# Altium PCB PCB_Микроконтроллер_2_2024-08-21.pcbdoc
Units mil, origin at the board's own origin, x right, y up, seen from the top; angles counter-clockwise.
Board outline 3360.7 x 2770 mil, 2 copper layers (Top Layer, Bottom Layer); 19 components, 17 nets, 81 pads, 0 vias.
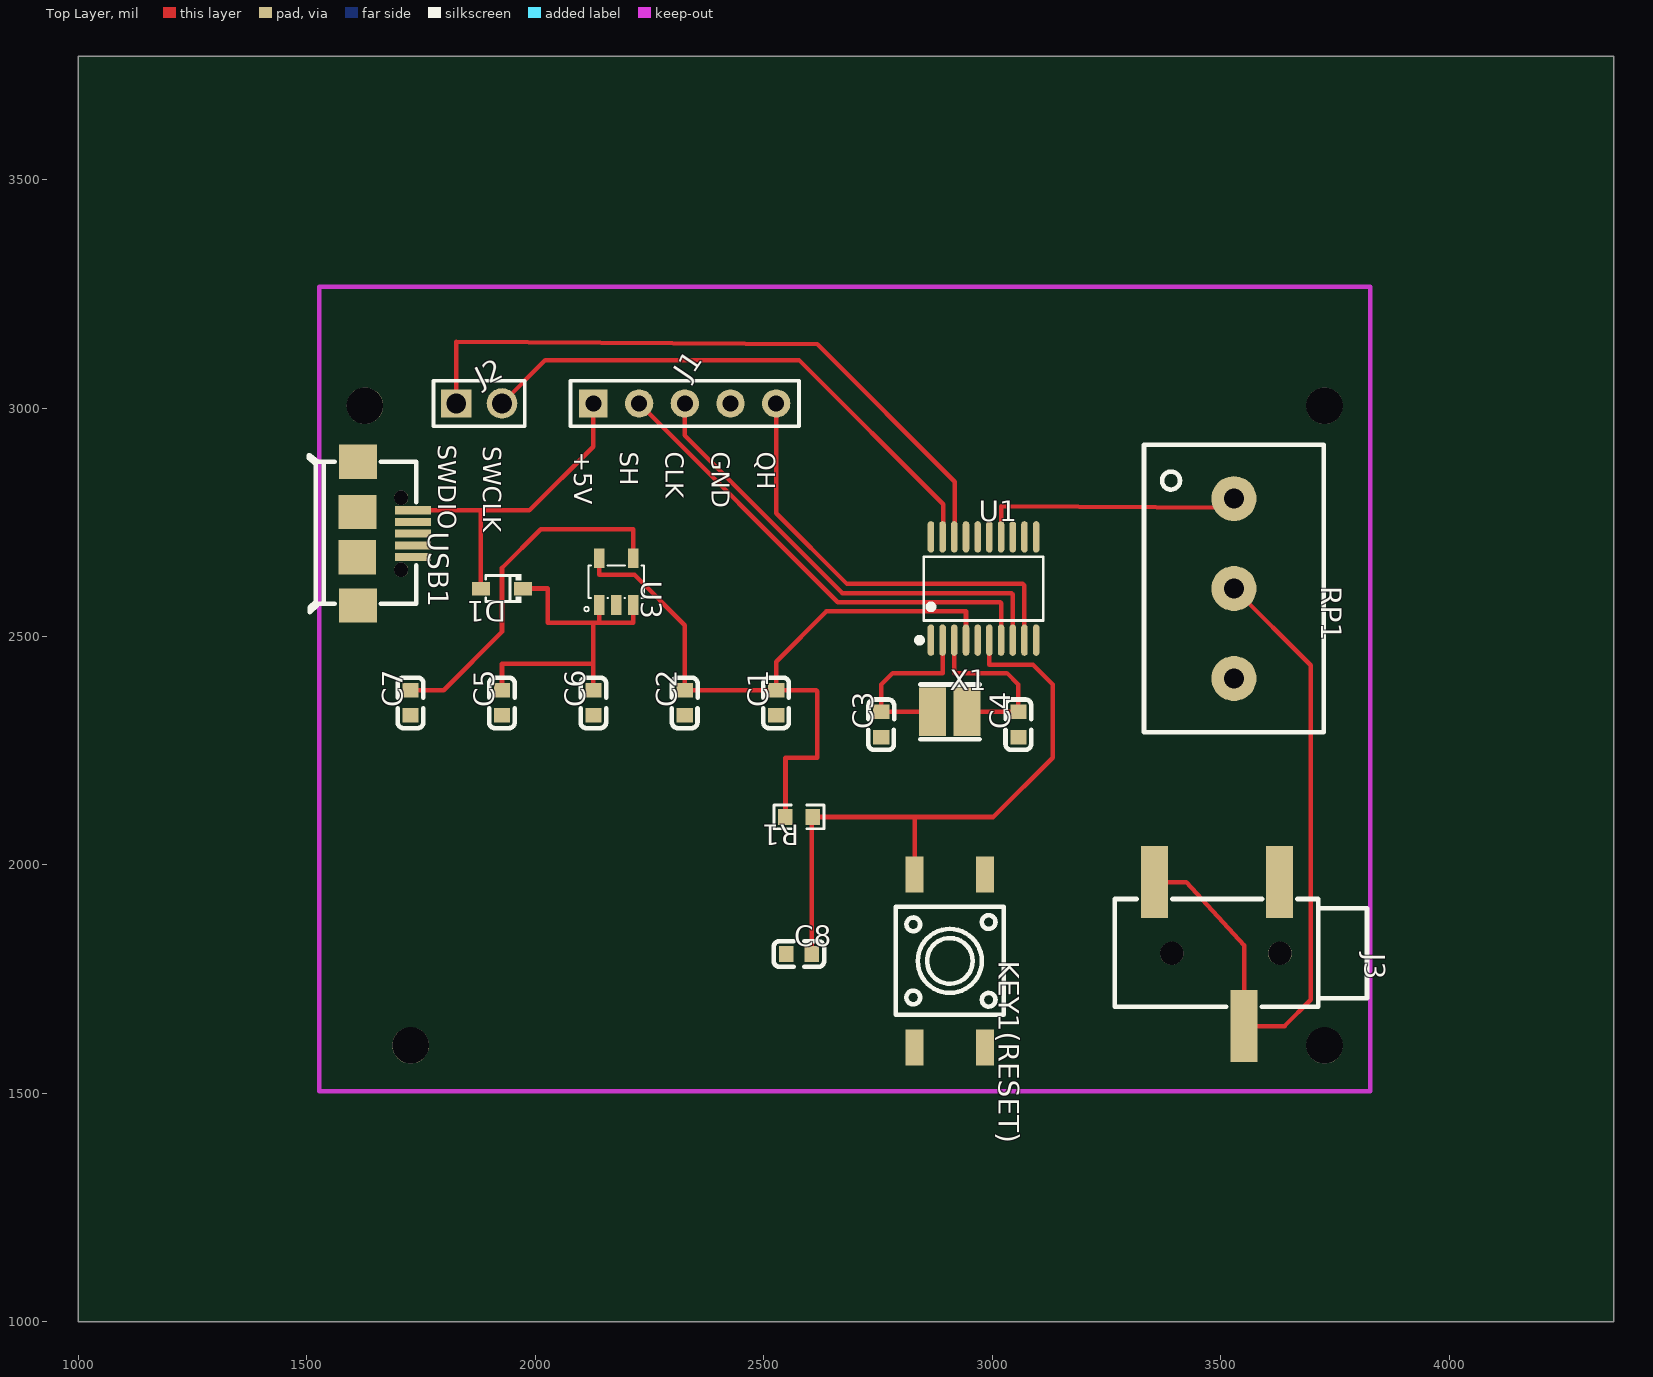
[diagram p0: Top Layer view]
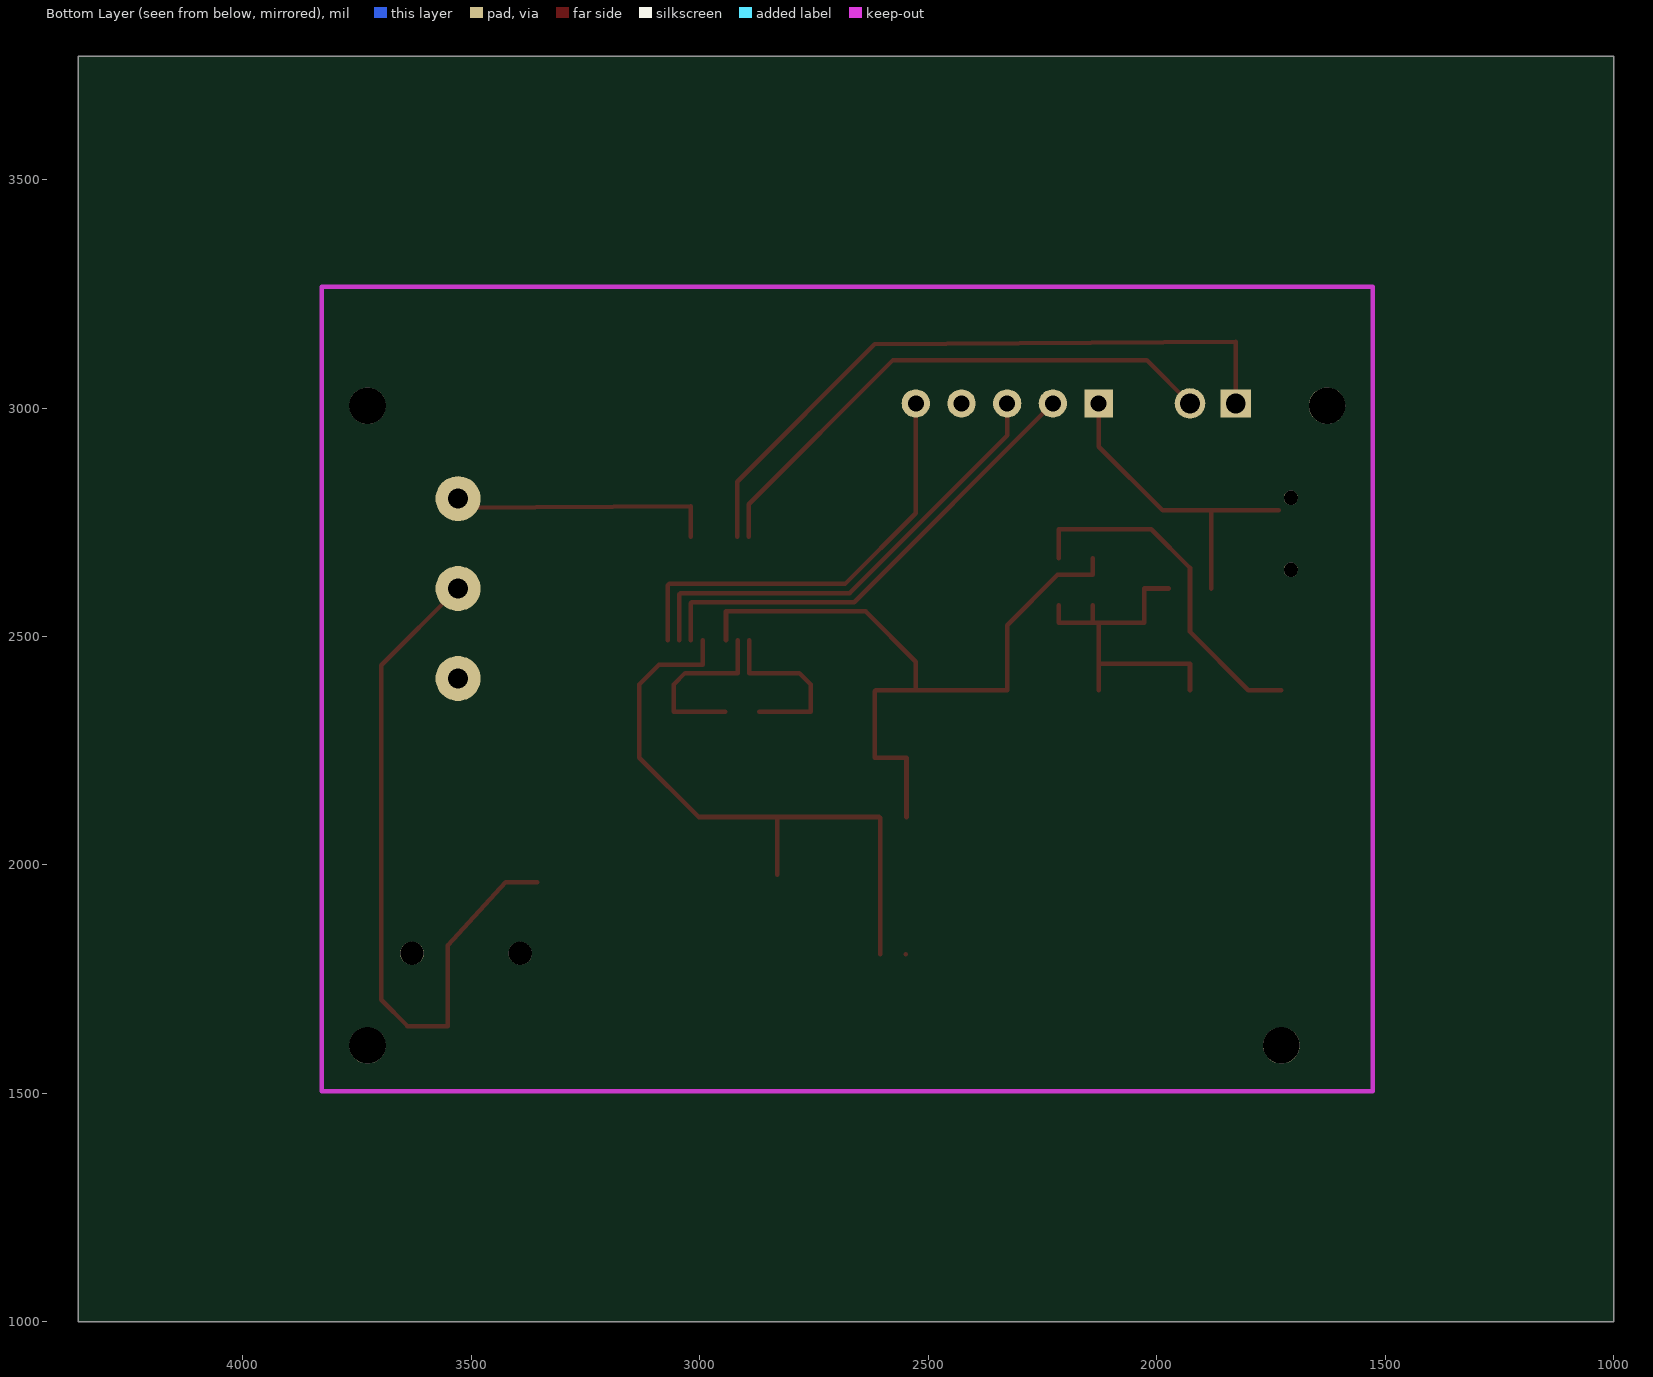
[diagram p1: Bottom Layer view, seen from below]

## Layer stack, top to bottom
Top Layer: signal copper (thickness not stored)
Dielectric: dielectric 12.6, FR-4, Dk 4.8
Bottom Layer: signal copper (thickness not stored)

## Board outline
4360.7,1000 1000,1000 1000,3770 4360.7,3770

## Components (designator, comment, footprint, x,y, rotation, side; value= is the part's Value field where it differs from the comment)
C1 "1uF" C0603 2527.57,2355 r90 top
C2 "100nF" C0603 2327.57,2355 r90 top
C3 "10pF" C0603 2757.57,2307.44 r90 top
C4 "10pF" C0603 3057.57,2307.44 r90 top
C5 "1uF" C0603 1927.57,2355 r90 top
C6 "100nF" C0603 2127.57,2355 r90 top
C7 "10nF" C0603 1727.57,2355 r90 top
C8 "0.1u" C0603 2577.57,1805 r0 top
D1 "BAT60JFILM" SOD-323_L1.8-W1.3-LS2.5-RD 1927.57,2605 r180 top
J1 "HDR-M-2.54_1x5" HDR-M-2.54_1X5 2327.57,3010 r0 top
J2 "HDR-M-2.54_1x2" HDR-M-2.54_1X2 1877.57,3010 r0 top
J3 "320B/PJ-001 3.5Jacks" AUDIO-SMD_C3792 3492.57,1805 r270 top
KEY1(RESET) "K4-6×6_SMD" KEY-SMD_4P-L6.0-W6.0-P3.90-LS10.0 2907.57,1790 r270 top
R1 "100k" R0603 2577.57,2105 r180 top
RP1 "POTRES COPY COPY" ПОТЕНЦИОМЕТР 3332.57,2290 r270 top
U1 "STM32G030F6P6" TSSOP-20_L6.5-W4.4-P0.65-LS6.4-BL 2981.3,2605 r0 top
U3 "LD3985M33R" SOT-23-5_L3.0-W1.7-P0.95-LS2.8-BR 2177.57,2620 r270 top
USB1 "MICRO USB B" "GENERIC MICRO USB / MICRO-USB-SMD_MICRO-USB-16" 1672.57,2725 r270 top
X1 "8MHz" OSC-SMD_2P-L3.2-W2.5 2907.57,2335 r0 top

## Footprints (in the part's own frame and the unit in brackets; to place one, negate y for a bottom-side part, rotate by r counter-clockwise, add the part's x,y. Pads: shape width x height; smd on the part's side, far side on the other; paste and mask are expansions set on the pad)
AUDIO-SMD_C3792 [mil]
  rect 157.48x59.05 smd paste+0 mask+2: 1(-157.5,137) 2(-157.5,-137) 3(157.5,59)
  round 51.18 hole 51.18 unplated paste+0: ""(-1.5,137.64) ""(-1.5,-99.37)
  silkscreen extent -121,-224 116,328
C0603 [mm]
  rect 0.8x0.9 smd paste+0 mask+0.051: 1(-0.7,0) 2(0.7,0)
  silkscreen extent -1.41,-0.71 1.39,0.72
"GENERIC MICRO USB / MICRO-USB-SMD_MICRO-USB-16" [mm]
  rect 0.45x2 smd paste+0 mask+0.051: 1(-1.301,1.535) 2(-0.65,1.535) 3(0,1.535) 4(0.65,1.535) 5(1.3,1.535)
  rect 1.9x2.1 smd paste+0 mask+0.051: 6(-4,-1.535) 6(-1.21,-1.55) 6(1.31,-1.57) 6(4,-1.535)
  round 0.8 hole 0.8 unplated paste+0: ""(-2,0.864) ""(2,0.864)
  silkscreen extent -4.37,-4.26 4.38,1.72
HDR-M-2.54_1X2 [mm]
  rect 1.7x1.575 hole 1.1 paste+0 mask+0.051: 1(-1.27,0)
  round 1.7 hole 1.1 paste+0 mask+0.051: 2(1.27,0)
  silkscreen extent -2.54,-1.27 2.54,1.27
HDR-M-2.54_1X5 [mil]
  rect 62x62 hole 35 paste+0 mask+2: 1(-200,0)
  round 62 hole 35 paste+0 mask+2: 2(-100,0) 3(0,0) 4(100,0) 5(200,0)
  silkscreen extent -250,-50 250,50
KEY-SMD_4P-L6.0-W6.0-P3.90-LS10.0 [mm]
  rect 2x1 smd paste+0 mask+0.051: 1(-4.8,1.95) 2(4.8,1.95) 3(-4.8,-1.95) 4(4.8,-1.95)
  silkscreen extent -3,-3 3,3
OSC-SMD_2P-L3.2-W2.5 [mm]
  rect 1.5x2.7 smd paste+0 mask+0.051: 1(0.95,0) 2(-0.95,0)
  silkscreen extent -1.65,-1.52 1.65,1.52
R0603 [mil]
  rect 31.75x34.02 smd paste-3937.01 mask+2: 1(-29.66,0) 2(29.65,0)
  silkscreen extent -55,-26 55,26
SOD-323_L1.8-W1.3-LS2.5-RD [mm]
  rect 1x0.75 smd paste+0 mask+0.051: 1(-1.173,0) 2(1.173,0)
  silkscreen extent -1.08,-0.8 0.9,0.8
SOT-23-5_L3.0-W1.7-P0.95-LS2.8-BR [mm]
  rect 1.1x0.6 smd paste+0 mask+0.051: 1(1.3,-0.95) 2(1.3,0) 3(1.3,0.95) 4(-1.3,0.95) 5(-1.3,-0.95)
  silkscreen extent -0.9,-1.78 1.65,1.55
TSSOP-20_L6.5-W4.4-P0.65-LS6.4-BL [mm]
  oval 0.364x1.742 smd paste+0 mask+0.051: 1(-2.925,-2.871) 2(-2.275,-2.871) 3(-1.625,-2.871) 4(-0.975,-2.871) 5(-0.325,-2.871) 6(0.325,-2.871) 7(0.975,-2.871) 8(1.625,-2.871) 9(2.275,-2.871) 10(2.925,-2.871) 11(2.925,2.871) 12(2.275,2.871) 13(1.625,2.871) 14(0.975,2.871) 15(0.325,2.871) 16(-0.325,2.871) 17(-0.975,2.871) 18(-1.625,2.871) 19(-2.275,2.871) 20(-2.925,2.871)
  silkscreen extent -3.71,-3.02 3.33,1.77
ПОТЕНЦИОМЕТР [mm]
  round 2.5 hole 1.1 paste+0 mask+0.051: 1(-13,4.999) 2(-8.001,4.999) 3(-3,4.999)
  silkscreen extent -16,0 0,10

## Free pads (board coordinates)
  round 80 hole 80 unplated paste+0: ""(1627.57,3005) ""(1727.57,1605) ""(3727.57,1605) ""(3727.57,3005)

## Nets (pads, with @x,y where several pads share a name; then routed paths per layer and width w, separated by ;. In a path a pad name is that pad's centre, name@x,y a point inside that pad or via, vN(x,y) a via of type N, cw(c..) or ccw(c..) an arc to the next point about the centre after c; other vN are vias at no path point)
+3V3: C1.2 C2.2 R1.2 U1.4 U3.5 | length 1633.7
  Top Layer w10: U3.5 2140.16,2635 2217.57,2635 2327.57,2525 C2.2 ; C2.2 C1.2 ; R1.2 2547.91,2235 2617.57,2235 2617.57,2380 2615.01,2382.56 C1.2 ; U1.4 2942.91,2555 2637.57,2555 2527.57,2445 C1.2
+5V: D1.2 J1.1 USB1.1 | length 717.9
  Top Layer w10: USB1.1 1987.57,2776.22 2127.57,2915 J1.1 ; D1.2 1881.4,2776.21
CLK: J1.3 U1.8 | length 1032.1
  Top Layer w10: J1.3 2327.57,2940 2672.57,2595 3042.57,2595 3045.28,2592.28 U1.8
GND: C1.1 C2.1 C3.1 C4.1 C5.1 C6.1 C7.1 C8.1 J1.4 J3.1 KEY1(RESET).2 RP1.3 U1.5 U3.2 USB1.5 | length 0.5
  Top Layer w10: C8.1@2550.01,1804.47 C8.1
J3_2: J3.2 J3.3 RP1.2 | length 1573.1
  Top Layer w10: J3.2 3425.07,1962.5 3551.57,1824 J3.3 3640.07,1647.5 3697.57,1705 3697.57,2436.8 RP1.2
QH: J1.5 U1.9 | length 968.6
  Top Layer w10: J1.5 2527.57,2770 2682.57,2615 3067.57,2615 3070.87,2611.69 U1.9
S$6: 
S$19: 
SH/LD#: J1.2 U1.7 | length 1054.1
  Top Layer w10: J1.2 2662.57,2575 3017.57,2575 3019.69,2572.87 U1.7
SWCLK: J2.2 U1.19 | length 1207
  Top Layer w10: J2.2 2022.57,3105 2577.57,3105 2892.99,2789.57 U1.19@2892.99,2718.03
SWDIO: J2.1 U1.18 | length 1471.7
  Top Layer w10: J2.1 1827.57,3145 2617.57,3140 2918.59,2838.98 U1.18@2918.59,2718.03
U1_2: C3.2 U1.2 X1.2 | length 389.1
  Top Layer w10: X1.2 C3.2 2757.57,2395 2782.57,2420 2891.74,2420 U1.2
U1_3: C4.2 U1.3 X1.1 | length 395.2
  Top Layer w10: U1.3 2917.33,2420 3032.57,2420 3057.57,2395 C4.2 X1.1
U1_6: C8.2 KEY1(RESET).3 R1.1 U1.6 | length 1402.5
  Top Layer w10: C8.2 2605.12,2102.9 R1.1 3002.57,2105 3132.57,2235 3132.57,2395 3089.59,2437.97 2994.11,2437.97 U1.6 ; 2830.8,2005.11 2830.8,1978.98 2830.8,2105
U1_14: RP1.1 U1.14 | length 576.7
  Top Layer w10: U1.14 3019.69,2785 RP1.1@3529.37,2782
U3_1: C5.2 C6.2 D1.1 U3.1 U3.3 | length 798.7
  Top Layer w10: C5.2 1927.57,2440 2127.57,2440 ; D1.1 2027.57,2605 2027.57,2530 2127.57,2530 ; C6.2 2127.57,2435.29 2127.57,2440 ; 2140.16,2530 U3.1 ; U3.3 2214.97,2530 2127.57,2530 ; 2127.57,2440 2127.57,2530
U3_4: C7.2 U3.4 | length 779.2
  Top Layer w10: C7.2 1800.12,2382.56 1927.57,2510 1927.57,2650 2012.57,2735 2214.97,2735 U3.4
pads on no net: J3. KEY1(RESET).1 KEY1(RESET).4 U1.1 U1.10 U1.11 U1.12 U1.13 U1.15 U1.16 U1.17 U1.20 USB1. USB1.2 USB1.3 USB1.4 USB1.6

## Silkscreen, mask and mechanical layers (free items; w line width, h text height)
Top Overlay:
  text "SWDIO" at 1787.88,2920 h39.37 r270
  text "SWCLK" at 1886.08,2916.8 h39.37 r270
  text "+5V" at 2086.08,2904.5 h39.37 r270
  text "SH" at 2186.08,2904.5 h39.37 r270
  text "CLK" at 2286.08,2904.5 h39.37 r270
  text "GND" at 2386.08,2904.5 h39.37 r270
  text "QH" at 2486.08,2904.5 h39.37 r270